# EAGLE board DRV10983%20Rev%20B.brd (EAGLE 7.2.0)
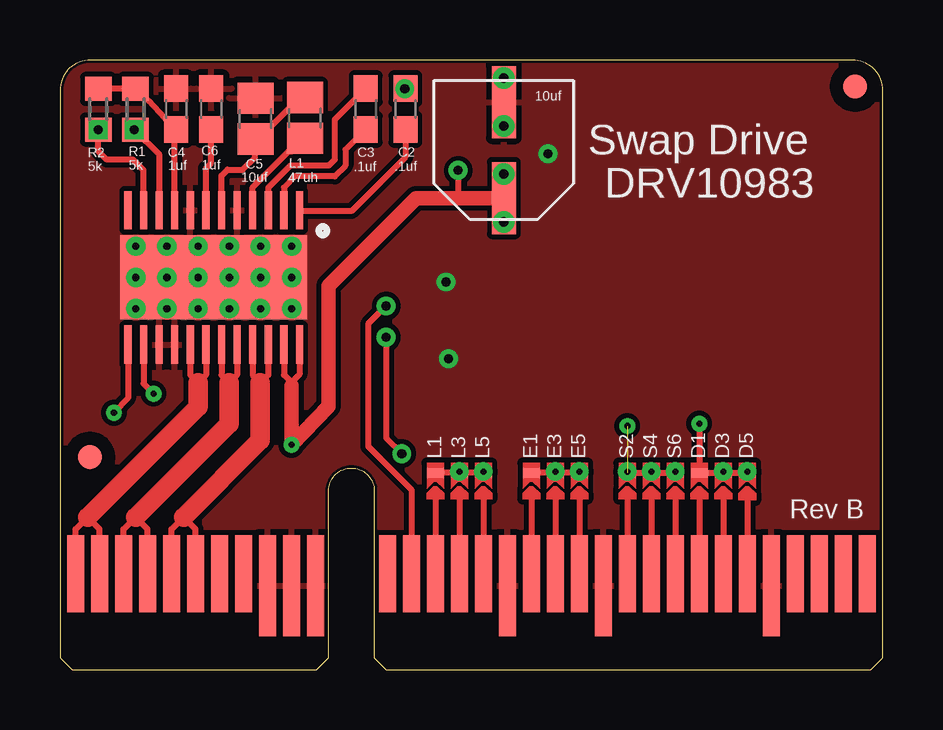
[diagram p0: board, top side]
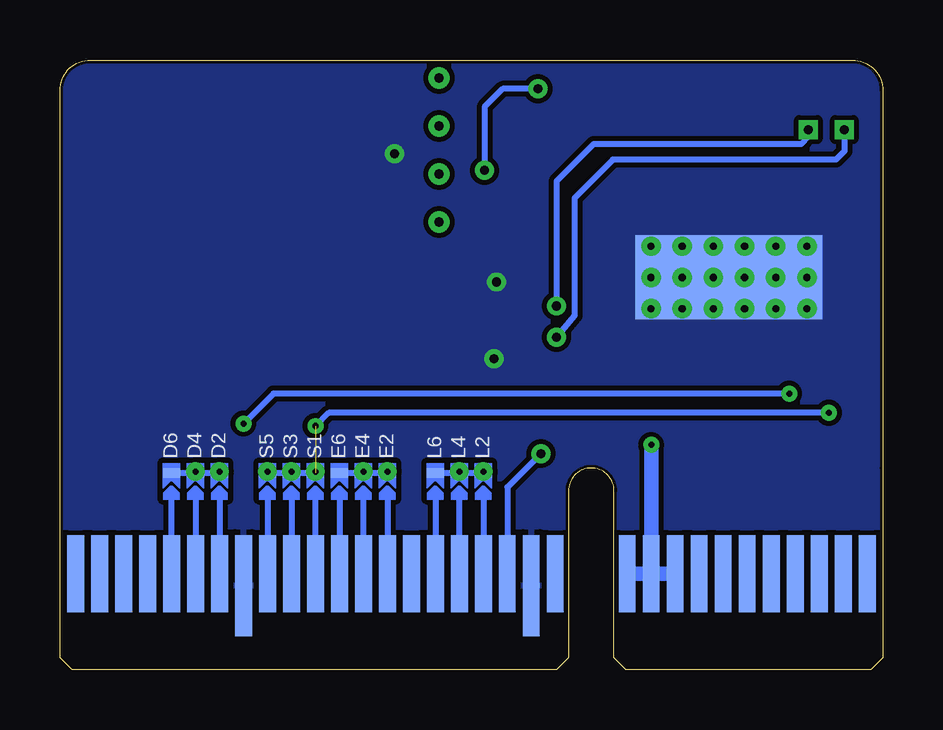
[diagram p1: board, bottom side, seen from below]

Size 34.3 x 25.4 mm. Coordinates in mm from the lower left corner, seen from the top.
Outline: 34.3,8.4 34.3,24.13 arc90 33.03,25.4 1.27,25.4 arc90 0,24.13 0,8.4
Copper layers (1*16): Top 0.035mm / dielectric 1.5mm / Bottom 0.035mm
Design rules "default *": minimum track width 10mil, minimum drill 24mil, track to track 8mil, track to pad 8mil, pad to pad 8mil, via to via 8mil, smd to smd 8mil, copper to edge 5mil, drill to drill 8mil, minimum pad ring 10mil, minimum via ring 8mil, stop-mask expansion 4mil, vias tented up to drill 25mil, thermal gap 10mil

## Footprints (pad centres in the part's own frame; a part is rotated, then mirrored left to right if it is on the bottom)
C0603 = smd 1.1 x 1: 1 -0.85,0; 2 0.85,0
C0805 = smd 1.3 x 1.5: 1 -0.85,0; 2 0.85,0
R0603 = smd 1 x 1.1: 1 -0.85,0; 2 0.85,0
PCIE_64_SMART_BOARD = smd 0.7 x 4.2: GND@1 8.65,3.5; GND@2 9.65,3.5; GND@3 10.65,3.5; P$49 18.65,3.5; P$53 22.65,3.5; P$60 29.65,3.5 | smd 0.7 x 3.2 bottom: P$1 0.65,4; P$2 1.65,4; P$3 2.65,4; P$4 3.65,4; P$5 4.65,4; P$6 5.65,4; P$7 6.65,4; P$8 7.65,4; P$9 8.65,4; P$10 9.65,4; P$11 10.65,4; P$12 13.65,4; P$14 15.65,4; P$15 16.65,4; P$16 17.65,4; P$17 18.65,4; P$18 19.65,4; P$19 20.65,4; P$20 21.65,4; P$21 22.65,4; P$22 23.65,4; P$23 24.65,4; P$24 25.65,4; P$26 27.65,4; P$27 28.65,4; P$28 29.65,4; P$29 30.65,4; P$30 31.65,4; P$31 32.65,4; P$32 33.65,4 | smd 0.7 x 4.2 bottom: P$13 14.65,3.5; P$25 26.65,3.5 | smd 0.7 x 0.4 bottom: P$15@1 16.65,8.2; P$16@1 17.65,8.2; P$17@1 18.65,8.2; P$19@1 20.65,8.2; P$20@1 21.65,8.2; P$21@1 22.65,8.2; P$22@1 23.65,8.2; P$23@1 24.65,8.2; P$24@1 25.65,8.2; P$26@1 27.65,8.2; P$27@1 28.65,8.2; P$28@1 29.65,8.2 | smd 0.7 x 3.2: P$33 0.65,4; P$34 1.65,4; P$35 2.65,4; P$36 3.65,4; P$37 4.65,4; P$38 5.65,4; P$39 6.65,4; P$40 7.65,4; P$44 13.65,4; P$45 14.65,4; P$46 15.65,4; P$47 16.65,4; P$48 17.65,4; P$50 19.65,4; P$51 20.65,4; P$52 21.65,4; P$54 23.65,4; P$55 24.65,4; P$56 25.65,4; P$57 26.65,4; P$58 27.65,4; P$59 28.65,4; P$61 30.65,4; P$62 31.65,4; P$63 32.65,4; P$64 33.65,4 | drill 0.254 pad 0.305: P$41 21.65,8.25; P$42 17.65,8.25; P$43 16.65,8.25; P$65 20.65,8.25; P$66 23.65,8.25; P$67 24.65,8.25; P$68 27.65,8.25; P$69 28.65,8.25; P$70 25.65,8.25 | smd 0.7 x 0.4: P$46@1 15.65,8.2; P$47@1 16.65,8.2; P$48@1 17.65,8.2; P$50@1 19.65,8.2; P$51@1 20.65,8.2; P$52@1 21.65,8.2; P$54@1 23.65,8.2; P$55@1 24.65,8.2; P$56@1 25.65,8.2; P$57@1 26.65,8.2; P$58@1 27.65,8.2; P$59@1 28.65,8.2
HTSS0P-24 = smd 7.8 x 3.5 bottom: GND 0,0 | smd 7.8 x 3.5: GND@1 0,0 | drill 0.3: GND@3 -3.25,1.3; GND@4 -1.95,1.3; GND@5 -0.65,1.3; GND@6 0.65,1.3; GND@7 1.95,1.3; GND@8 3.25,1.3; GND@9 3.25,0; GND@10 1.95,0; GND@11 0.65,0; GND@12 -0.65,0; GND@13 -1.95,0; GND@14 -3.25,0; GND@15 -3.25,-1.3; GND@16 -1.95,-1.3; GND@17 -0.65,-1.3; GND@18 0.65,-1.3; GND@19 1.95,-1.3; GND@20 3.25,-1.3 | smd 0.3 x 1.6: P$1 -3.575,-2.8; P$2 -2.925,-2.8; P$3 -2.275,-2.8; P$4 -1.625,-2.8; P$5 -0.975,-2.8; P$6 -0.325,-2.8; P$7 0.325,-2.8; P$8 0.975,-2.8; P$9 1.625,-2.8; P$10 2.275,-2.8; P$11 2.925,-2.8; P$12 3.575,-2.8; P$13 3.575,2.8; P$14 2.925,2.8; P$15 2.275,2.8; P$16 1.625,2.8; P$17 0.975,2.8; P$18 0.325,2.8; P$19 -0.325,2.8; P$20 -0.975,2.8; P$21 -1.625,2.8; P$22 -2.275,2.8; P$23 -2.925,2.8; P$24 -3.575,2.8
EEEFK0J220R = smd 1 x 3: P$1 0,2; P$2 0,-2 | drill 0.381: P$3 0,1; P$5 0,3; P$6 0,-1; P$8 0,-3
FIDUCIAL_1MM = smd 1 x 1: 1 0,0

## Placement (x,y rotation side)
C2  .1uf  [C0603]  14.4,23.36 270 top
C3  .1uf  [C0603]  12.74,23.36 270 top
C4  1uf  [C0603]  4.84,23.36 270 top
C5  10uf  [C0805]  8.15,22.96 270 top
C6  1uf  [C0603]  6.31,23.36 270 top
L1  47uh  [C0805]  10.21,22.98 270 top
R1  5k  [R0603]  3.15,23.35 270 top
R2  5k  [R0603]  1.6,23.35 270 top
U$1  [PCIE_64_SMART_BOARD]  0,0 0 top
U$2  DRV10983  [HTSS0P-24]  6.41,16.34 180 top
U$3  10uf  [EEEFK0J220R]  18.5,21.65 180 top
U$4  FIDUCIAL  [FIDUCIAL_1MM]  33.15,24.3 0 top
U$5  FIDUCIAL  [FIDUCIAL_1MM]  1.25,8.85 0 top

## Library data of the parts
C2-C6 L1 R1 R2 U$4 U$5 = adafruit
U$1-U$3 = PocketNC

## Nets
DIR: U$1.P$57@1 U$2.P$14
GND: C4.1 C5.1 C6.1 U$1.GND@1 U$1.GND@2 U$1.GND@3 U$1.P$13 U$1.P$25 U$1.P$49 U$1.P$53 U$1.P$60 U$2.GND U$2.GND@1 U$2.GND@3 U$2.GND@4 U$2.GND@5 U$2.GND@6 U$2.GND@7 U$2.GND@8 U$2.GND@9 U$2.GND@10 U$2.GND@11 U$2.GND@12 U$2.GND@13 U$2.GND@14 U$2.GND@15 U$2.GND@16 U$2.GND@17 U$2.GND@18 U$2.GND@19 U$2.GND@20 U$2.P$5 U$2.P$8 U$2.P$15 U$2.P$16 U$3.P$2
N$1: C2.2 U$2.P$1
N$2: C3.2 U$2.P$2
N$3: C3.1 U$2.P$3
N$6: C6.2 U$2.P$7
PWM: U$1.P$22@1 U$2.P$13
SCL: R1.2 U$1.P$45 U$2.P$10
SDA: R2.2 U$1.P$14 U$2.P$11
SW: L1.2 U$2.P$4
U: U$1.P$33 U$1.P$34 U$2.P$17 U$2.P$18
V: U$1.P$35 U$1.P$36 U$2.P$19 U$2.P$20
V3P3: C4.2 R1.1 R2.1 U$2.P$9
VCC: C2.1 U$1.P$9 U$1.P$10 U$1.P$11 U$2.P$23 U$2.P$24 U$3.P$1
VREG: C5.2 L1.1 U$2.P$6
W: U$1.P$37 U$1.P$38 U$2.P$21 U$2.P$22

## Tracks (layer width: path | path; a pad name or v marks a point on that pad's centre or on a via)
DIR  (via drill 0.25)
  Top 0.254: U$2.P$14 3.48,11.91 v3.9,11.5 | v26.65,10.25 U$1.P$57@1
  Bottom 0.254: v3.9,11.5 25.4,11.5 v26.65,10.25
GND  (via drill 0.38)
  other vias: 20.35,21.5 16.2,12.95 16.1,16.15
  pour Top: 0.02,25.49 0.02,3 34.24,3 34.24,25.49
  pour Bottom: 0.02,25.49 0.02,3 34.24,3 34.24,25.49
N$1
  Top 0.254: C2.2 14.4,21.35 12.15,19.1 10.03,19.1 U$2.P$1
N$2
  Top 0.254: C3.2 11.9,21.67 11.9,21 11.45,20.55 9.8,20.55 9.34,20.09 U$2.P$2
N$3
  Top 0.254: C3.1 11.45,22.92 11.45,21.25 11.2,21 9.6,21 8.69,20.09 U$2.P$3
N$6
  Top 0.254: U$2.P$7 6.08,20.89 6.3,21.1 C6.2
PWM  (via drill 0.25)  (1 unrouted)
  Top 0.254: U$2.P$13 2.83,11.31 v2.25,10.7
  Bottom 0.254: v2.25,10.7 23.1,10.7 v23.65,10.15
SCL  (via drill 0.38)
  Top 0.254: R1.2 3.08,22.43 3.08,22.52 v3.1,22.5 4.15,21.45 4.15,19.16 U$2.P$10 | v13.6,15.15 12.85,14.4 12.85,9.3 14.65,7.5 U$1.P$45
  Bottom 0.254: v3.1,22.5 3.1,22.2 3.4,21.9 12.05,21.9 13.6,20.35 v13.6,15.15
SDA  (via drill 0.38)
  Top 0.254: 1.6,22.3 R2.2 1.6,21.6 1.95,21.25 3.05,21.25 3.48,20.82 U$2.P$11 | v13.6,13.85 13.6,9.65 v14.25,9
  Bottom 0.254: R2.2 1.6,21.6 1.95,21.25 11.25,21.25 12.85,19.65 12.85,14.75 v13.6,13.85 | v14.25,9 15.65,7.6 U$1.P$14
  other vias: 1.6,22.5
SW
  Top 0.254: U$2.P$4 8.04,20.1 9.53,21.59 9.67,21.59 L1.2
U
  Top 0.254: U$1.P$34 1.65,5.85 1.15,6.35 0.65,5.85 U$1.P$33 | U$2.P$17 5.43,12.27 5.75,11.95 6.08,12.29 U$2.P$18
  Top 0.813: 1.15,6.35 5.75,10.95 5.75,11.95
V
  Top 0.254: U$1.P$36 3.65,5.85 3.15,6.35 2.65,5.85 U$1.P$35 | U$2.P$20 7.38,12.29 7.05,11.95 6.74,12.27 U$2.P$19
  Top 0.813: 3.15,6.35 7.05,10.25 7.05,11.95
V3P3
  Top 0.254: R2.1 R1.1 3.3,24.05 3.7,23.7 4.39,22.96 C4.2 4.79,22.45 U$2.P$9
VCC  (via drill 0.25, 0.38)
  Top 0.254: 9.65,11.97 9.65,11.83 | U$2.P$24 9.98,12.3 9.65,11.97 | U$2.P$23 9.34,12.29 9.65,11.97 | C2.1 14.49,24.21 v14.37,24.2 | v16.6,20.8 16.6,19.65
  Top 0.61: 9.65,11.83 v9.65,9.37 11.2,10.97 11.2,16 14.85,19.65 16.6,19.65 U$3.P$1
  Bottom 0.254: v14.37,24.2 15.85,24.2 16.6,23.45 v16.6,20.8
  Bottom 0.61: v9.65,9.37 U$1.P$10 | U$1.P$9 U$1.P$10 | U$1.P$10 U$1.P$11
VREG
  Top 0.254: U$2.P$6 6.74,20.58 6.99,20.83 7.62,20.83 8.13,21.34 8.13,22.09 C5.2 8.65,22.61 8.76,22.61 9.99,23.83 L1.1
W
  Top 0.254: U$1.P$38 5.65,5.85 5.15,6.35 4.65,5.85 U$1.P$37 | U$2.P$22 8.69,12.29 8.35,11.95 8.04,12.27 U$2.P$21
  Top 0.813: 5.15,6.35 8.35,9.55 8.35,11.95

## Text on the board
tNames: Swap Drive | DRV10983 | Rev B